# EAGLE board krajBB-Mojžiš_Matej4 (EAGLE 7.7.0)
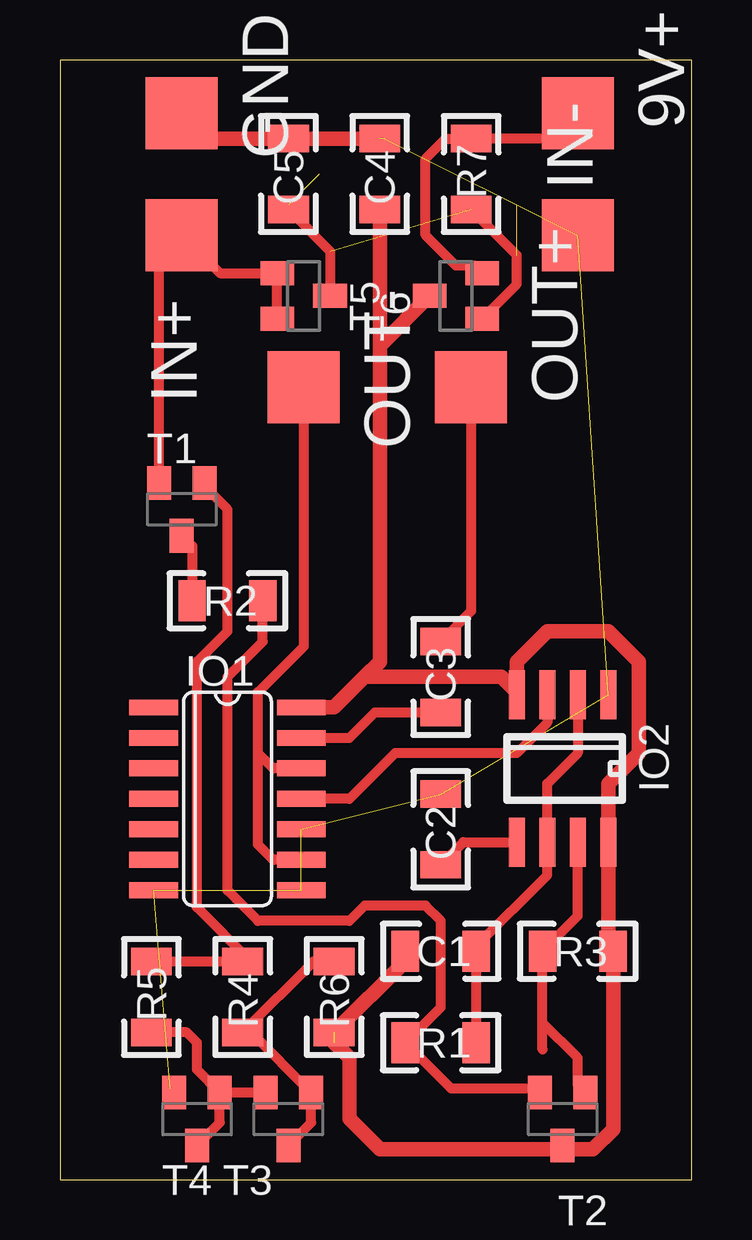
[diagram p0: board, top side]

Size 26.34 x 46.66 mm. Coordinates in mm from the lower left corner, seen from the top.
Outline: 0,0 26.34,0 26.34,46.66 0,46.66 0,0
Copper layers (1*16): Top 0.035mm / dielectric 1.5mm / Bottom 0.035mm
Design rules "default *": minimum track width 10mil, minimum drill 24mil, track to track 8mil, track to pad 8mil, pad to pad 8mil, via to via 8mil, smd to smd 8mil, copper to edge 16mil, drill to drill 8mil, minimum pad ring 10mil, minimum via ring 8mil, stop-mask expansion 4mil, vias tented up to drill 0mil, thermal gap 10mil

## Footprints (pad centres in the part's own frame; a part is rotated, then mirrored left to right if it is on the bottom)
SMD3X3 = smd 3 x 3: P$1 0,0
1206 = smd 1.143 x 1.702: 1 -1.473,0; 2 1.473,0
SO14 = smd 0.66 x 2.032: 1 -3.81,-3.073; 2 -2.54,-3.073; 3 -1.27,-3.073; 4 0,-3.073; 5 1.27,-3.073; 6 2.54,-3.073; 7 3.81,-3.073; 8 3.81,3.073; 9 2.54,3.073; 10 1.27,3.073; 11 0,3.073; 12 -1.27,3.073; 13 -2.54,3.073; 14 -3.81,3.073
SO08 = smd 0.66 x 2.032: 1 -1.905,-3.073; 2 -0.635,-3.073; 3 0.635,-3.073; 4 1.905,-3.073; 5 1.905,3.073; 6 0.635,3.073; 7 -0.635,3.073; 8 -1.905,3.073
LD-DR-3519 = drill 1 pad 1.93 long: P$1 -3,-15; P$2 3,-15
SOT23-BEC = smd 1 x 1.4: B -0.95,-1.1; C 0,1.1; E 0.95,-1.1
SOT23 = smd 1 x 1.4: 1 -0.95,-1.1; 2 0.95,-1.1; 3 0,1.1

## Placement (x,y rotation side)
9V+  SMD3X3  [SMD3X3]  21.59,44.45 90 top
C1  1u  [1206]  15.88,9.53 180 top
C2  1u  [1206]  15.88,14.61 270 top
C3  1u  [1206]  15.88,20.95 90 top
C4  1u  [1206]  13.34,41.91 270 top
C5  1u  [1206]  9.53,41.91 270 top
GND  SMD3X3  [SMD3X3]  5.08,44.45 90 top
IN+  SMD3X3  [SMD3X3]  5.08,39.37 90 top
IN-  SMD3X3  [SMD3X3]  21.59,39.37 90 top
IO1  4013D  [SO14]  6.99,15.88 270 top
IO2  NE555D  [SO08]  20.95,17.14 180 top
OUT+  SMD3X3  [SMD3X3]  17.14,33.02 90 top
OUT-  SMD3X3  [SMD3X3]  10.16,33.02 90 top
R1  100  [1206]  15.88,5.71 0 top
R2  470  [1206]  6.99,24.13 0 top
R3  10k  [1206]  21.59,9.53 0 top
R4  10k  [1206]  7.62,7.62 270 top
R5  2.2k  [1206]  3.81,7.62 90 top
R6  47k  [1206]  11.43,7.62 270 top
R7  10M  [1206]  17.14,41.91 90 top
REPRODUKTOR  LD-DR-3519  [LD-DR-3519]  76.83,23.5 0 top  (outside the outline)
T1  BC817-25  [SOT23-BEC]  5.08,27.94 180 top
T2  BC817-25  [SOT23-BEC]  20.95,2.54 180 top
T3  BC817-25  [SOT23-BEC]  9.53,2.54 180 top
T4  BC817-25  [SOT23-BEC]  5.71,2.54 180 top
T5  BSS84  [SOT23]  10.16,36.83 270 top
T6  BSS84  [SOT23]  16.51,36.83 90 top
U$1  9VBATTERY  [9VBATTERY]  43.81,24.13 0 top  (outside the outline)

## Library data of the parts
9V+ GND IN+ IN- OUT+ OUT- = solpad
C1-C5 R1-R7 = rcl
IO1 = 40xx
IO2 = linear
REPRODUKTOR = buzzer
T1-T4 = transistor-npn
T5 T6 = transistor-small-signal
U$1 = battery

## Nets
9V_1: R4.2 R6.1 T3.B T3.C
9V_2: R5.1 T3.E T4.B T4.C
+9V: C1.2 C4.2 IO1.14 IO2.4 IO2.8 R3.2 R6.2 T2.C T6.3
CLOCK: IO1.11 IO2.3
CV: C2.2 IO2.5
DIS: IO2.7 R3.1 T2.B
DIS_1: R2.1 T1.C
DIS_IN: R1.1 R2.2 T2.E
DIV: R4.1 R5.2 T1.B
GND: C2.1 C4.1 C5.1 GND.P$1 IN-.P$1 IO1.7 IO1.8 IO1.10 IO2.1 T4.E
IN: IN+.P$1 T1.E T5.1 T5.2
MOS: C5.2 R7.1 T5.3 T6.1
OUT: C3.1 IO1.13
REP: C3.2 OUT+.P$1
REP+: IO1.9 IO1.12 OUT-.P$1
THR: C1.1 IO2.2 IO2.6 R1.2
VIN: 9V+.P$1 R7.2 T6.2

## Tracks (layer width: path | path; a pad name or v marks a point on that pad's centre or on a via)
9V_1
  Top 0.406: T3.C 10.47,2.39 T3.B 7.97,6.15 R4.2 10.57,9.09 R6.1
9V_2
  Top 0.406: T3.E T4.B | T4.B 6.67,2.39 T4.C 5.54,1.27 | T4.B 5.71,4.59 5.71,5.71 5.28,6.15 R5.1
+9V  (1 unrouted)
  Top 0.61: IO1.14 11.43,19.68 12.7,20.95 | 12.7,20.95 18.41,20.95 19.05,20.32 | 19.05,20.32 IO2.4 | C4.2 13.34,34.76 | T6.3 13.34,34.76 | 13.34,34.76 13.34,21.59 12.7,20.95 | R6.2 14.4,9.12 C1.2 | 11.43,5.71 12.06,5.08 12.06,2.54 13.34,1.27 20.79,1.27 T2.C 21.12,1.27 22.23,1.27 23.06,2.11 R3.2 22.86,9.73 IO2.8 22.86,16.51 24.13,17.78 24.13,21.59 22.86,22.86 20.32,22.86 19.05,21.59 19.05,20.32
CLOCK
  Top 0.406: IO1.11 12.06,15.88 13.97,17.78 19.05,17.78 20.32,19.05 IO2.3
CV
  Top 0.406: IO2.5 16.82,14.07 C2.2
DIS
  Top 0.406: IO2.7 21.59,11 R3.1 20.12,8.89 20.12,6.55 | 20.12,5.43 20.12,6.55 | T2.B 21.59,3.96 21.59,5.08 20.12,6.55
DIS_1
  Top 0.406: T1.C 5.51,26.41 R2.1
DIS_IN
  Top 0.406: R2.2 8.46,22.43 6.99,20.95 6.99,12.06 8.26,10.79 12.06,10.79 12.7,11.43 15.24,11.43 15.88,10.79 15.88,7.19 R1.1 16.31,3.81 19.84,3.81 T2.E
DIV
  Top 0.406: R5.2 4.13,9.41 | R5.2 R4.1 7.97,9.09 5.71,11.35 5.71,21.59 6.99,22.86 6.99,27.94 6.03,28.89 T1.B | R5.2
GND  (8 unrouted)
  Top 0.61: T4.E 4.59,3.81 | GND.P$1 6.15,43.38 C5.1 C4.1
IN
  Top 0.406: T5.2 T5.1 6.67,37.78 IN+.P$1 4.13,38.42 T1.E
MOS  (3 unrouted)
  Top 0.406: 9.53,40.64 C5.2 11.26,38.7 T5.3 | T6.1 19.05,37.32 19.05,38.53 R7.1
OUT
  Top 0.406: IO1.13 12.06,18.41 13.13,19.48 C3.1
REP
  Top 0.406: OUT+.P$1 17.14,23.7 C3.2
REP+
  Top 0.406: IO1.9 8.89,13.34 8.26,13.97 8.26,17.78 | IO1.12 8.89,17.14 8.26,17.78 | 8.26,17.78 8.26,20.32 10.16,22.23 OUT-.P$1
THR
  Top 0.406: IO2.6 20.32,13.97 | IO2.6 20.32,12.7 17.35,9.73 C1.1 R1.2 | IO2.6 20.32,16.51 21.59,17.78 IO2.2
VIN
  Top 0.406: 21.16,44.45 9V+.P$1 20.52,43.38 R7.2 16.08,43.38 15.24,42.55 15.24,39.37 16.51,38.1 17.29,38.1 T6.2